# Altium PCB Cell.PcbDoc
Units mil, origin at the board's own origin, x right, y up, seen from the top; angles counter-clockwise.
Board outline 6000 x 4000 mil, 2 copper layers (Top Layer, Bottom Layer); 176 components, 145 nets, 448 pads, 0 vias.
Unrouted connection lines stored in the file: 271.
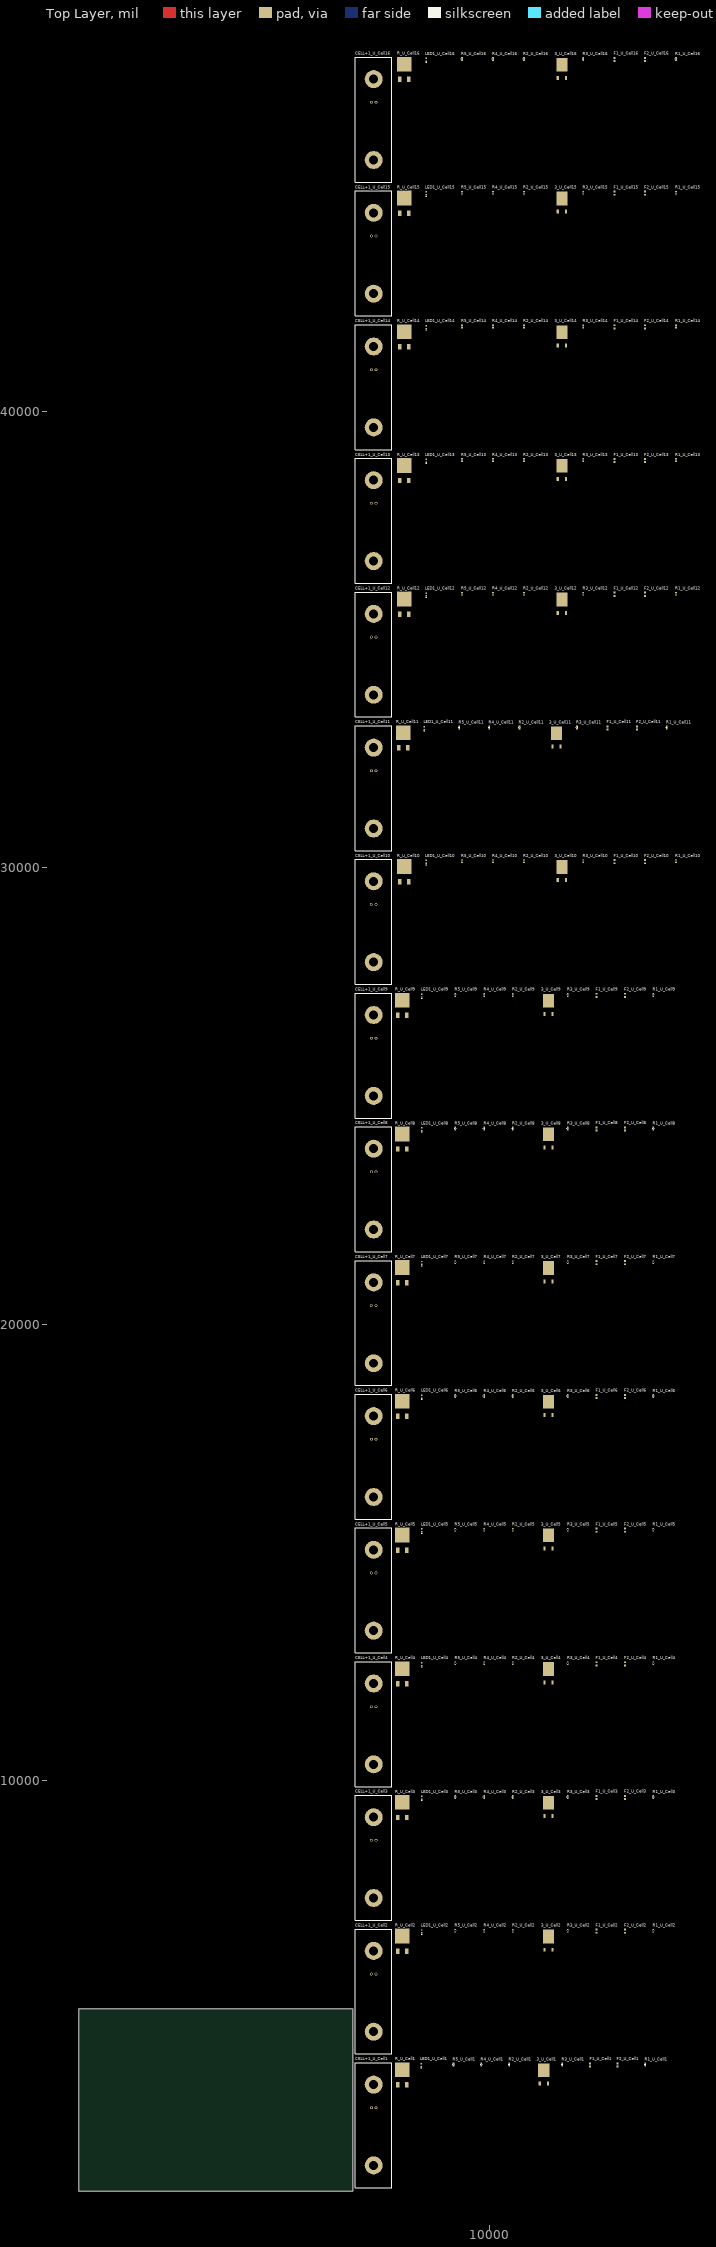
[diagram p0: Top Layer view]
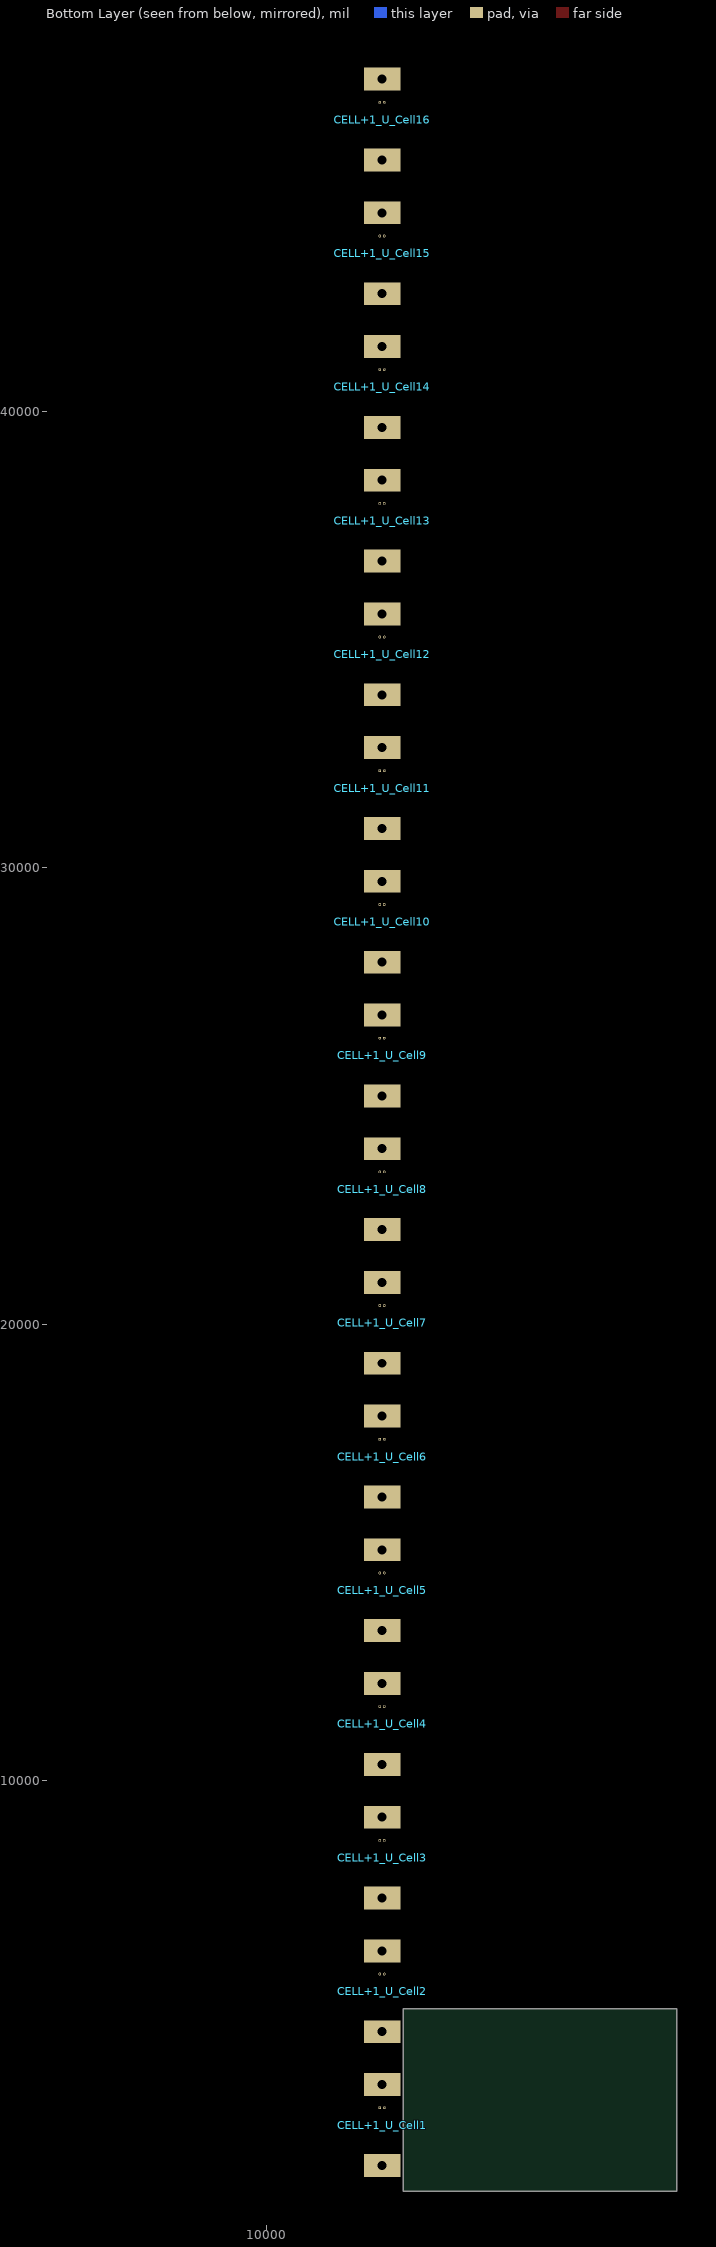
[diagram p1: Bottom Layer view, seen from below]

## Layer stack, top to bottom
Top Solder: solder mask 0.4, Solder Resist, Dk 3.5
Top Layer: signal copper 1.4
Dielectric 1: dielectric 12.6, FR-4, Dk 4.8
Bottom Layer: signal copper 1.4
Bottom Solder: solder mask 0.4, Solder Resist, Dk 3.5

## Board outline
1000,1000 7000,1000 7000,5000 1000,5000

## Design rules (kind name [scope] priority, off if disabled: settings)
Clearance [All] p1: gap=10 ignorepadtopadclearanceinfootprint=FALSE except(0: Arc-Hole Track-Hole SMDPad-Hole THPad-Hole Via-Hole Fill-Hole Poly-Hole Region-Hole Text-Hole)
PolygonConnect [All] p1: connectstyle=Relief reliefconductorwidth=10 reliefentries=4 polygonreliefangle="90 Angle" airgapwidth=10
RoomDefinition U_Cell16 [InComponentClass('U_Cell16')] p1: confinementstyle=ConfineIn formatcopy=TRUE lockcomponents=FALSE outline 7045,45015 14690,45015 14690,47890 7045,47890
RoomDefinition U_Cell15 [InComponentClass('U_Cell15')] p2: confinementstyle=ConfineIn formatcopy=TRUE lockcomponents=FALSE outline 7045,42085 14690,42085 14690,44960 7045,44960
RoomDefinition U_Cell14 [InComponentClass('U_Cell14')] p3: confinementstyle=ConfineIn formatcopy=TRUE lockcomponents=FALSE outline 7045,39155 14690,39155 14690,42030 7045,42030
RoomDefinition U_Cell13 [InComponentClass('U_Cell13')] p4: confinementstyle=ConfineIn formatcopy=TRUE lockcomponents=FALSE outline 7045,36225 14690,36225 14690,39100 7045,39100
RoomDefinition U_Cell12 [InComponentClass('U_Cell12')] p5: confinementstyle=ConfineIn formatcopy=TRUE lockcomponents=FALSE outline 7045,33295 14690,33295 14690,36170 7045,36170
RoomDefinition U_Cell10 [InComponentClass('U_Cell10')] p6: confinementstyle=ConfineIn formatcopy=TRUE lockcomponents=FALSE outline 7045,27435 14690,27435 14690,30310 7045,30310
RoomDefinition U_Cell9 [InComponentClass('U_Cell9')] p7: confinementstyle=ConfineIn formatcopy=TRUE lockcomponents=FALSE outline 7045,24505 14145,24505 14145,27380 7045,27380
RoomDefinition U_Cell8 [InComponentClass('U_Cell8')] p8: confinementstyle=ConfineIn formatcopy=TRUE lockcomponents=FALSE outline 7045,21575 14145,21575 14145,24450 7045,24450
RoomDefinition U_Cell7 [InComponentClass('U_Cell7')] p9: confinementstyle=ConfineIn formatcopy=TRUE lockcomponents=FALSE outline 7045,18645 14145,18645 14145,21520 7045,21520
RoomDefinition U_Cell6 [InComponentClass('U_Cell6')] p10: confinementstyle=ConfineIn formatcopy=TRUE lockcomponents=FALSE outline 7045,15715 14145,15715 14145,18590 7045,18590
RoomDefinition U_Cell5 [InComponentClass('U_Cell5')] p11: confinementstyle=ConfineIn formatcopy=TRUE lockcomponents=FALSE outline 7045,12785 14145,12785 14145,15660 7045,15660
RoomDefinition U_Cell4 [InComponentClass('U_Cell4')] p12: confinementstyle=ConfineIn formatcopy=TRUE lockcomponents=FALSE outline 7045,9855 14145,9855 14145,12730 7045,12730
RoomDefinition U_Cell3 [InComponentClass('U_Cell3')] p13: confinementstyle=ConfineIn formatcopy=TRUE lockcomponents=FALSE outline 7045,6925 14145,6925 14145,9800 7045,9800
RoomDefinition U_Cell2 [InComponentClass('U_Cell2')] p14: confinementstyle=ConfineIn formatcopy=TRUE lockcomponents=FALSE outline 7045,3995 14145,3995 14145,6870 7045,6870
RoomDefinition U_Cell1 [InComponentClass('U_Cell1')] p15: confinementstyle=ConfineIn formatcopy=TRUE lockcomponents=FALSE outline 7045,1065 13945,1065 13945,3940 7045,3940
RoomDefinition U_Cell11 [InComponentClass('U_Cell11')] p16: confinementstyle=ConfineIn formatcopy=TRUE lockcomponents=FALSE outline 1340,1115 3270,1115 3270,3980 1340,3980
RoutingVias [All] p1: holewidth=28 width=50 viastyle="Through Hole" minholewidth=28 minwidth=50 maxholewidth=28 maxwidth=50
SolderMaskExpansion [All] p1: expansion=4
Width [All] p1: maxlimit=10 minlimit=10 preferedwidth=10
30 further rules are at their usual default settings.

## Classes and differential pairs
channel class Cell: U_Cell1 U_Cell2 U_Cell3 U_Cell4 U_Cell5 U_Cell6 U_Cell7 U_Cell8 U_Cell9 U_Cell10 U_Cell11 U_Cell12 U_Cell13 U_Cell14 U_Cell15 U_Cell16
net class NEG[1..16]: NEG1 NEG2 NEG3 NEG4 NEG5 NEG6 NEG7 NEG8 NEG9 NEG10 NEG11 NEG12 NEG13 NEG14 NEG15 NEG16
component class U_Cell16: 3_U_Cell16 CELL+1_U_Cell16 F1_U_Cell16 F2_U_Cell16 LED1_U_Cell16 R1_U_Cell16 R2_U_Cell16 R3_U_Cell16 R4_U_Cell16 R5_U_Cell16 R_U_Cell16
component class U_Cell15: 3_U_Cell15 CELL+1_U_Cell15 F1_U_Cell15 F2_U_Cell15 LED1_U_Cell15 R1_U_Cell15 R2_U_Cell15 R3_U_Cell15 R4_U_Cell15 R5_U_Cell15 R_U_Cell15
component class U_Cell14: 3_U_Cell14 CELL+1_U_Cell14 F1_U_Cell14 F2_U_Cell14 LED1_U_Cell14 R1_U_Cell14 R2_U_Cell14 R3_U_Cell14 R4_U_Cell14 R5_U_Cell14 R_U_Cell14
component class U_Cell13: 3_U_Cell13 CELL+1_U_Cell13 F1_U_Cell13 F2_U_Cell13 LED1_U_Cell13 R1_U_Cell13 R2_U_Cell13 R3_U_Cell13 R4_U_Cell13 R5_U_Cell13 R_U_Cell13
component class U_Cell12: 3_U_Cell12 CELL+1_U_Cell12 F1_U_Cell12 F2_U_Cell12 LED1_U_Cell12 R1_U_Cell12 R2_U_Cell12 R3_U_Cell12 R4_U_Cell12 R5_U_Cell12 R_U_Cell12
component class U_Cell11: 3_U_Cell11 CELL+1_U_Cell11 F1_U_Cell11 F2_U_Cell11 LED1_U_Cell11 R1_U_Cell11 R2_U_Cell11 R3_U_Cell11 R4_U_Cell11 R5_U_Cell11 R_U_Cell11
component class U_Cell10: 3_U_Cell10 CELL+1_U_Cell10 F1_U_Cell10 F2_U_Cell10 LED1_U_Cell10 R1_U_Cell10 R2_U_Cell10 R3_U_Cell10 R4_U_Cell10 R5_U_Cell10 R_U_Cell10
component class U_Cell9: 3_U_Cell9 CELL+1_U_Cell9 F1_U_Cell9 F2_U_Cell9 LED1_U_Cell9 R1_U_Cell9 R2_U_Cell9 R3_U_Cell9 R4_U_Cell9 R5_U_Cell9 R_U_Cell9
component class U_Cell8: 3_U_Cell8 CELL+1_U_Cell8 F1_U_Cell8 F2_U_Cell8 LED1_U_Cell8 R1_U_Cell8 R2_U_Cell8 R3_U_Cell8 R4_U_Cell8 R5_U_Cell8 R_U_Cell8
component class U_Cell7: 3_U_Cell7 CELL+1_U_Cell7 F1_U_Cell7 F2_U_Cell7 LED1_U_Cell7 R1_U_Cell7 R2_U_Cell7 R3_U_Cell7 R4_U_Cell7 R5_U_Cell7 R_U_Cell7
component class U_Cell6: 3_U_Cell6 CELL+1_U_Cell6 F1_U_Cell6 F2_U_Cell6 LED1_U_Cell6 R1_U_Cell6 R2_U_Cell6 R3_U_Cell6 R4_U_Cell6 R5_U_Cell6 R_U_Cell6
component class U_Cell5: 3_U_Cell5 CELL+1_U_Cell5 F1_U_Cell5 F2_U_Cell5 LED1_U_Cell5 R1_U_Cell5 R2_U_Cell5 R3_U_Cell5 R4_U_Cell5 R5_U_Cell5 R_U_Cell5
component class U_Cell4: 3_U_Cell4 CELL+1_U_Cell4 F1_U_Cell4 F2_U_Cell4 LED1_U_Cell4 R1_U_Cell4 R2_U_Cell4 R3_U_Cell4 R4_U_Cell4 R5_U_Cell4 R_U_Cell4
component class U_Cell3: 3_U_Cell3 CELL+1_U_Cell3 F1_U_Cell3 F2_U_Cell3 LED1_U_Cell3 R1_U_Cell3 R2_U_Cell3 R3_U_Cell3 R4_U_Cell3 R5_U_Cell3 R_U_Cell3
component class U_Cell2: 3_U_Cell2 CELL+1_U_Cell2 F1_U_Cell2 F2_U_Cell2 LED1_U_Cell2 R1_U_Cell2 R2_U_Cell2 R3_U_Cell2 R4_U_Cell2 R5_U_Cell2 R_U_Cell2
component class U_Cell1: 3_U_Cell1 CELL+1_U_Cell1 F1_U_Cell1 F2_U_Cell1 LED1_U_Cell1 R1_U_Cell1 R2_U_Cell1 R3_U_Cell1 R4_U_Cell1 R5_U_Cell1 R_U_Cell1

## Components (designator, comment, footprint, x,y, rotation, side; value= is the part's Value field where it differs from the comment)
3_U_Cell1 "DMP10H400SK3-13" TO252 11190,3650 r0 top (schematic designator 3)
3_U_Cell2 "DMP10H400SK3-13" TO252 11290,6580 r0 top (schematic designator 3)
3_U_Cell3 "DMP10H400SK3-13" TO252 11290,9510 r0 top (schematic designator 3)
3_U_Cell4 "DMP10H400SK3-13" TO252 11290,12440 r0 top (schematic designator 3)
3_U_Cell5 "DMP10H400SK3-13" TO252 11290,15370 r0 top (schematic designator 3)
3_U_Cell6 "DMP10H400SK3-13" TO252 11290,18300 r0 top (schematic designator 3)
3_U_Cell7 "DMP10H400SK3-13" TO252 11290,21230 r0 top (schematic designator 3)
3_U_Cell8 "DMP10H400SK3-13" TO252 11290,24160 r0 top (schematic designator 3)
3_U_Cell9 "DMP10H400SK3-13" TO252 11290,27090 r0 top (schematic designator 3)
3_U_Cell10 "DMP10H400SK3-13" TO252 11585,30020 r0 top (schematic designator 3)
3_U_Cell11 "DMP10H400SK3-13" TO252 11465,32950 r0 top (schematic designator 3)
3_U_Cell12 "DMP10H400SK3-13" TO252 11585,35880 r0 top (schematic designator 3)
3_U_Cell13 "DMP10H400SK3-13" TO252 11585,38810 r0 top (schematic designator 3)
3_U_Cell14 "DMP10H400SK3-13" TO252 11585,41740 r0 top (schematic designator 3)
3_U_Cell15 "DMP10H400SK3-13" TO252 11585,44670 r0 top (schematic designator 3)
3_U_Cell16 "DMP10H400SK3-13" TO252 11585,47600 r0 top (schematic designator 3)
CELL+1_U_Cell1 "LI6PT" 6PT 7060,1080 r0 top (schematic designator CELL+1)
CELL+1_U_Cell2 "LI6PT" 6PT 7060,4010 r0 top (schematic designator CELL+1)
CELL+1_U_Cell3 "LI6PT" 6PT 7060,6940 r0 top (schematic designator CELL+1)
CELL+1_U_Cell4 "LI6PT" 6PT 7060,9870 r0 top (schematic designator CELL+1)
CELL+1_U_Cell5 "LI6PT" 6PT 7060,12800 r0 top (schematic designator CELL+1)
CELL+1_U_Cell6 "LI6PT" 6PT 7060,15730 r0 top (schematic designator CELL+1)
CELL+1_U_Cell7 "LI6PT" 6PT 7060,18660 r0 top (schematic designator CELL+1)
CELL+1_U_Cell8 "LI6PT" 6PT 7060,21590 r0 top (schematic designator CELL+1)
CELL+1_U_Cell9 "LI6PT" 6PT 7060,24520 r0 top (schematic designator CELL+1)
CELL+1_U_Cell10 "LI6PT" 6PT 7060,27450 r0 top (schematic designator CELL+1)
CELL+1_U_Cell11 "LI6PT" 6PT 7060,30380 r0 top (schematic designator CELL+1)
CELL+1_U_Cell12 "LI6PT" 6PT 7060,33310 r0 top (schematic designator CELL+1)
CELL+1_U_Cell13 "LI6PT" 6PT 7060,36240 r0 top (schematic designator CELL+1)
CELL+1_U_Cell14 "LI6PT" 6PT 7060,39170 r0 top (schematic designator CELL+1)
CELL+1_U_Cell15 "LI6PT" 6PT 7060,42100 r0 top (schematic designator CELL+1)
CELL+1_U_Cell16 "LI6PT" 6PT 7060,45030 r0 top (schematic designator CELL+1)
F1_U_Cell1 "SF-0603FP" 0603 12205,3765 r90 top (schematic designator F1)
F1_U_Cell2 "SF-0603FP" 0603 12345,6695 r90 top (schematic designator F1)
F1_U_Cell3 "SF-0603FP" 0603 12345,9625 r90 top (schematic designator F1)
F1_U_Cell4 "SF-0603FP" 0603 12345,12555 r90 top (schematic designator F1)
F1_U_Cell5 "SF-0603FP" 0603 12345,15485 r90 top (schematic designator F1)
F1_U_Cell6 "SF-0603FP" 0603 12345,18415 r90 top (schematic designator F1)
F1_U_Cell7 "SF-0603FP" 0603 12345,21345 r90 top (schematic designator F1)
F1_U_Cell8 "SF-0603FP" 0603 12345,24275 r90 top (schematic designator F1)
F1_U_Cell9 "SF-0603FP" 0603 12345,27205 r90 top (schematic designator F1)
F1_U_Cell10 "SF-0603FP" 0603 12740,30135 r90 top (schematic designator F1)
F1_U_Cell11 "SF-0603FP" 0603 12580,33065 r90 top (schematic designator F1)
F1_U_Cell12 "SF-0603FP" 0603 12740,35995 r90 top (schematic designator F1)
F1_U_Cell13 "SF-0603FP" 0603 12740,38925 r90 top (schematic designator F1)
F1_U_Cell14 "SF-0603FP" 0603 12740,41855 r90 top (schematic designator F1)
F1_U_Cell15 "SF-0603FP" 0603 12740,44785 r90 top (schematic designator F1)
F1_U_Cell16 "SF-0603FP" 0603 12740,47715 r90 top (schematic designator F1)
F2_U_Cell1 "SF-0603FP" 0603 12805,3765 r90 top (schematic designator F2)
F2_U_Cell2 "SF-0603FP" 0603 12965,6695 r90 top (schematic designator F2)
F2_U_Cell3 "SF-0603FP" 0603 12965,9625 r90 top (schematic designator F2)
F2_U_Cell4 "SF-0603FP" 0603 12965,12555 r90 top (schematic designator F2)
F2_U_Cell5 "SF-0603FP" 0603 12965,15485 r90 top (schematic designator F2)
F2_U_Cell6 "SF-0603FP" 0603 12965,18415 r90 top (schematic designator F2)
F2_U_Cell7 "SF-0603FP" 0603 12965,21345 r90 top (schematic designator F2)
F2_U_Cell8 "SF-0603FP" 0603 12965,24275 r90 top (schematic designator F2)
F2_U_Cell9 "SF-0603FP" 0603 12965,27205 r90 top (schematic designator F2)
F2_U_Cell10 "SF-0603FP" 0603 13410,30135 r90 top (schematic designator F2)
F2_U_Cell11 "SF-0603FP" 0603 13230,33065 r90 top (schematic designator F2)
F2_U_Cell12 "SF-0603FP" 0603 13410,35995 r90 top (schematic designator F2)
F2_U_Cell13 "SF-0603FP" 0603 13410,38925 r90 top (schematic designator F2)
F2_U_Cell14 "SF-0603FP" 0603 13410,41855 r90 top (schematic designator F2)
F2_U_Cell15 "SF-0603FP" 0603 13410,44785 r90 top (schematic designator F2)
F2_U_Cell16 "SF-0603FP" 0603 13410,47715 r90 top (schematic designator F2)
LED1_U_Cell1 "150060SS75000" 0603_A 8500,3760 r90 top (schematic designator LED1)
LED1_U_Cell2 "150060SS75000" 0603_A 8515,6690 r90 top (schematic designator LED1)
LED1_U_Cell3 "150060SS75000" 0603_A 8515,9620 r90 top (schematic designator LED1)
LED1_U_Cell4 "150060SS75000" 0603_A 8515,12550 r90 top (schematic designator LED1)
LED1_U_Cell5 "150060SS75000" 0603_A 8515,15480 r90 top (schematic designator LED1)
LED1_U_Cell6 "150060SS75000" 0603_A 8515,18410 r90 top (schematic designator LED1)
LED1_U_Cell7 "150060SS75000" 0603_A 8515,21340 r90 top (schematic designator LED1)
LED1_U_Cell8 "150060SS75000" 0603_A 8515,24270 r90 top (schematic designator LED1)
LED1_U_Cell9 "150060SS75000" 0603_A 8515,27200 r90 top (schematic designator LED1)
LED1_U_Cell10 "150060SS75000" 0603_A 8610,30130 r90 top (schematic designator LED1)
LED1_U_Cell11 "150060SS75000" 0603_A 8570,33060 r90 top (schematic designator LED1)
LED1_U_Cell12 "150060SS75000" 0603_A 8610,35990 r90 top (schematic designator LED1)
LED1_U_Cell13 "150060SS75000" 0603_A 8610,38920 r90 top (schematic designator LED1)
LED1_U_Cell14 "150060SS75000" 0603_A 8610,41850 r90 top (schematic designator LED1)
LED1_U_Cell15 "150060SS75000" 0603_A 8610,44780 r90 top (schematic designator LED1)
LED1_U_Cell16 "150060SS75000" 0603_A 8610,47710 r90 top (schematic designator LED1)
R1_U_Cell1 "100 1% 0603(1608)" RESC0603(1608)_L 13410,3775 r90 top value="2.94 Ohm" (schematic designator R1)
R1_U_Cell2 "100 1% 0603(1608)" RESC0603(1608)_L 13590,6705 r90 top value="2.94 Ohm" (schematic designator R1)
R1_U_Cell3 "100 1% 0603(1608)" RESC0603(1608)_L 13590,9635 r90 top value="2.94 Ohm" (schematic designator R1)
R1_U_Cell4 "100 1% 0603(1608)" RESC0603(1608)_L 13590,12565 r90 top value="2.94 Ohm" (schematic designator R1)
R1_U_Cell5 "100 1% 0603(1608)" RESC0603(1608)_L 13590,15495 r90 top value="2.94 Ohm" (schematic designator R1)
R1_U_Cell6 "100 1% 0603(1608)" RESC0603(1608)_L 13590,18425 r90 top value="2.94 Ohm" (schematic designator R1)
R1_U_Cell7 "100 1% 0603(1608)" RESC0603(1608)_L 13590,21355 r90 top value="2.94 Ohm" (schematic designator R1)
R1_U_Cell8 "100 1% 0603(1608)" RESC0603(1608)_L 13590,24285 r90 top value="2.94 Ohm" (schematic designator R1)
R1_U_Cell9 "100 1% 0603(1608)" RESC0603(1608)_L 13590,27215 r90 top value="2.94 Ohm" (schematic designator R1)
R1_U_Cell10 "100 1% 0603(1608)" RESC0603(1608)_L 14085,30145 r90 top value="2.94 Ohm" (schematic designator R1)
R1_U_Cell11 "100 1% 0603(1608)" RESC0603(1608)_L 13885,33075 r90 top value="2.94 Ohm" (schematic designator R1)
R1_U_Cell12 "100 1% 0603(1608)" RESC0603(1608)_L 14085,36005 r90 top value="2.94 Ohm" (schematic designator R1)
R1_U_Cell13 "100 1% 0603(1608)" RESC0603(1608)_L 14085,38935 r90 top value="2.94 Ohm" (schematic designator R1)
R1_U_Cell14 "100 1% 0603(1608)" RESC0603(1608)_L 14085,41865 r90 top value="2.94 Ohm" (schematic designator R1)
R1_U_Cell15 "100 1% 0603(1608)" RESC0603(1608)_L 14085,44795 r90 top value="2.94 Ohm" (schematic designator R1)
R1_U_Cell16 "100 1% 0603(1608)" RESC0603(1608)_L 14085,47725 r90 top value="2.94 Ohm" (schematic designator R1)
R2_U_Cell1 "2K 1% 0603(1608)" RESC0603(1608)_L 10430,3775 r90 top value="2.94 Ohm" (schematic designator R2)
R2_U_Cell2 "2K 1% 0603(1608)" RESC0603(1608)_L 10510,6705 r90 top value="2.94 Ohm" (schematic designator R2)
R2_U_Cell3 "2K 1% 0603(1608)" RESC0603(1608)_L 10510,9635 r90 top value="2.94 Ohm" (schematic designator R2)
R2_U_Cell4 "2K 1% 0603(1608)" RESC0603(1608)_L 10510,12565 r90 top value="2.94 Ohm" (schematic designator R2)
R2_U_Cell5 "2K 1% 0603(1608)" RESC0603(1608)_L 10510,15495 r90 top value="2.94 Ohm" (schematic designator R2)
R2_U_Cell6 "2K 1% 0603(1608)" RESC0603(1608)_L 10510,18425 r90 top value="2.94 Ohm" (schematic designator R2)
R2_U_Cell7 "2K 1% 0603(1608)" RESC0603(1608)_L 10510,21355 r90 top value="2.94 Ohm" (schematic designator R2)
R2_U_Cell8 "2K 1% 0603(1608)" RESC0603(1608)_L 10510,24285 r90 top value="2.94 Ohm" (schematic designator R2)
R2_U_Cell9 "2K 1% 0603(1608)" RESC0603(1608)_L 10510,27215 r90 top value="2.94 Ohm" (schematic designator R2)
R2_U_Cell10 "2K 1% 0603(1608)" RESC0603(1608)_L 10755,30145 r90 top value="2.94 Ohm" (schematic designator R2)
R2_U_Cell11 "2K 1% 0603(1608)" RESC0603(1608)_L 10655,33075 r90 top value="2.94 Ohm" (schematic designator R2)
R2_U_Cell12 "2K 1% 0603(1608)" RESC0603(1608)_L 10755,36005 r90 top value="2.94 Ohm" (schematic designator R2)
R2_U_Cell13 "2K 1% 0603(1608)" RESC0603(1608)_L 10755,38935 r90 top value="2.94 Ohm" (schematic designator R2)
R2_U_Cell14 "2K 1% 0603(1608)" RESC0603(1608)_L 10755,41865 r90 top value="2.94 Ohm" (schematic designator R2)
R2_U_Cell15 "2K 1% 0603(1608)" RESC0603(1608)_L 10755,44795 r90 top value="2.94 Ohm" (schematic designator R2)
R2_U_Cell16 "2K 1% 0603(1608)" RESC0603(1608)_L 10755,47725 r90 top value="2.94 Ohm" (schematic designator R2)
R3_U_Cell1 "100K NTC 1% 0603(1608)" RESC0603(1608)_L 11590,3775 r90 top value="2.94 Ohm" (schematic designator R3)
R3_U_Cell2 "100K NTC 1% 0603(1608)" RESC0603(1608)_L 11710,6705 r90 top value="2.94 Ohm" (schematic designator R3)
R3_U_Cell3 "100K NTC 1% 0603(1608)" RESC0603(1608)_L 11710,9635 r90 top value="2.94 Ohm" (schematic designator R3)
R3_U_Cell4 "100K NTC 1% 0603(1608)" RESC0603(1608)_L 11710,12565 r90 top value="2.94 Ohm" (schematic designator R3)
R3_U_Cell5 "100K NTC 1% 0603(1608)" RESC0603(1608)_L 11710,15495 r90 top value="2.94 Ohm" (schematic designator R3)
R3_U_Cell6 "100K NTC 1% 0603(1608)" RESC0603(1608)_L 11710,18425 r90 top value="2.94 Ohm" (schematic designator R3)
R3_U_Cell7 "100K NTC 1% 0603(1608)" RESC0603(1608)_L 11710,21355 r90 top value="2.94 Ohm" (schematic designator R3)
R3_U_Cell8 "100K NTC 1% 0603(1608)" RESC0603(1608)_L 11710,24285 r90 top value="2.94 Ohm" (schematic designator R3)
R3_U_Cell9 "100K NTC 1% 0603(1608)" RESC0603(1608)_L 11710,27215 r90 top value="2.94 Ohm" (schematic designator R3)
R3_U_Cell10 "100K NTC 1% 0603(1608)" RESC0603(1608)_L 12055,30145 r90 top value="2.94 Ohm" (schematic designator R3)
R3_U_Cell11 "100K NTC 1% 0603(1608)" RESC0603(1608)_L 11915,33075 r90 top value="2.94 Ohm" (schematic designator R3)
R3_U_Cell12 "100K NTC 1% 0603(1608)" RESC0603(1608)_L 12055,36005 r90 top value="2.94 Ohm" (schematic designator R3)
R3_U_Cell13 "100K NTC 1% 0603(1608)" RESC0603(1608)_L 12055,38935 r90 top value="2.94 Ohm" (schematic designator R3)
R3_U_Cell14 "100K NTC 1% 0603(1608)" RESC0603(1608)_L 12055,41865 r90 top value="2.94 Ohm" (schematic designator R3)
R3_U_Cell15 "100K NTC 1% 0603(1608)" RESC0603(1608)_L 12055,44795 r90 top value="2.94 Ohm" (schematic designator R3)
R3_U_Cell16 "100K NTC 1% 0603(1608)" RESC0603(1608)_L 12055,47725 r90 top value="2.94 Ohm" (schematic designator R3)
R4_U_Cell1 "330R 1% 0603(1608)" RESC0603(1608)_L 9820,3775 r90 top value="2.94 Ohm" (schematic designator R4)
R4_U_Cell2 "330R 1% 0603(1608)" RESC0603(1608)_L 9880,6705 r90 top value="2.94 Ohm" (schematic designator R4)
R4_U_Cell3 "330R 1% 0603(1608)" RESC0603(1608)_L 9880,9635 r90 top value="2.94 Ohm" (schematic designator R4)
R4_U_Cell4 "330R 1% 0603(1608)" RESC0603(1608)_L 9880,12565 r90 top value="2.94 Ohm" (schematic designator R4)
R4_U_Cell5 "330R 1% 0603(1608)" RESC0603(1608)_L 9880,15495 r90 top value="2.94 Ohm" (schematic designator R4)
R4_U_Cell6 "330R 1% 0603(1608)" RESC0603(1608)_L 9880,18425 r90 top value="2.94 Ohm" (schematic designator R4)
R4_U_Cell7 "330R 1% 0603(1608)" RESC0603(1608)_L 9880,21355 r90 top value="2.94 Ohm" (schematic designator R4)
R4_U_Cell8 "330R 1% 0603(1608)" RESC0603(1608)_L 9880,24285 r90 top value="2.94 Ohm" (schematic designator R4)
R4_U_Cell9 "330R 1% 0603(1608)" RESC0603(1608)_L 9880,27215 r90 top value="2.94 Ohm" (schematic designator R4)
R4_U_Cell10 "330R 1% 0603(1608)" RESC0603(1608)_L 10075,30145 r90 top value="2.94 Ohm" (schematic designator R4)
R4_U_Cell11 "330R 1% 0603(1608)" RESC0603(1608)_L 9995,33075 r90 top value="2.94 Ohm" (schematic designator R4)
R4_U_Cell12 "330R 1% 0603(1608)" RESC0603(1608)_L 10075,36005 r90 top value="2.94 Ohm" (schematic designator R4)
R4_U_Cell13 "330R 1% 0603(1608)" RESC0603(1608)_L 10075,38935 r90 top value="2.94 Ohm" (schematic designator R4)
R4_U_Cell14 "330R 1% 0603(1608)" RESC0603(1608)_L 10075,41865 r90 top value="2.94 Ohm" (schematic designator R4)
R4_U_Cell15 "330R 1% 0603(1608)" RESC0603(1608)_L 10075,44795 r90 top value="2.94 Ohm" (schematic designator R4)
R4_U_Cell16 "330R 1% 0603(1608)" RESC0603(1608)_L 10075,47725 r90 top value="2.94 Ohm" (schematic designator R4)
R5_U_Cell1 "3K3 1% 0603(1608)" RESC0603(1608)_L 9210,3775 r90 top value="2.94 Ohm" (schematic designator R5)
R5_U_Cell2 "3K3 1% 0603(1608)" RESC0603(1608)_L 9250,6705 r90 top value="2.94 Ohm" (schematic designator R5)
R5_U_Cell3 "3K3 1% 0603(1608)" RESC0603(1608)_L 9250,9635 r90 top value="2.94 Ohm" (schematic designator R5)
R5_U_Cell4 "3K3 1% 0603(1608)" RESC0603(1608)_L 9250,12565 r90 top value="2.94 Ohm" (schematic designator R5)
R5_U_Cell5 "3K3 1% 0603(1608)" RESC0603(1608)_L 9250,15495 r90 top value="2.94 Ohm" (schematic designator R5)
R5_U_Cell6 "3K3 1% 0603(1608)" RESC0603(1608)_L 9250,18425 r90 top value="2.94 Ohm" (schematic designator R5)
R5_U_Cell7 "3K3 1% 0603(1608)" RESC0603(1608)_L 9250,21355 r90 top value="2.94 Ohm" (schematic designator R5)
R5_U_Cell8 "3K3 1% 0603(1608)" RESC0603(1608)_L 9250,24285 r90 top value="2.94 Ohm" (schematic designator R5)
R5_U_Cell9 "3K3 1% 0603(1608)" RESC0603(1608)_L 9250,27215 r90 top value="2.94 Ohm" (schematic designator R5)
R5_U_Cell10 "3K3 1% 0603(1608)" RESC0603(1608)_L 9395,30145 r90 top value="2.94 Ohm" (schematic designator R5)
R5_U_Cell11 "3K3 1% 0603(1608)" RESC0603(1608)_L 9335,33075 r90 top value="2.94 Ohm" (schematic designator R5)
R5_U_Cell12 "3K3 1% 0603(1608)" RESC0603(1608)_L 9395,36005 r90 top value="2.94 Ohm" (schematic designator R5)
R5_U_Cell13 "3K3 1% 0603(1608)" RESC0603(1608)_L 9395,38935 r90 top value="2.94 Ohm" (schematic designator R5)
R5_U_Cell14 "3K3 1% 0603(1608)" RESC0603(1608)_L 9395,41865 r90 top value="2.94 Ohm" (schematic designator R5)
R5_U_Cell15 "3K3 1% 0603(1608)" RESC0603(1608)_L 9395,44795 r90 top value="2.94 Ohm" (schematic designator R5)
R5_U_Cell16 "3K3 1% 0603(1608)" RESC0603(1608)_L 9395,47725 r90 top value="2.94 Ohm" (schematic designator R5)
R_U_Cell1 "TKH45" TO252-TKH-45 8085,3820 r0 top (schematic designator R)
R_U_Cell2 "TKH45" TO252-TKH-45 8085,6750 r0 top (schematic designator R)
R_U_Cell3 "TKH45" TO252-TKH-45 8085,9680 r0 top (schematic designator R)
R_U_Cell4 "TKH45" TO252-TKH-45 8085,12610 r0 top (schematic designator R)
R_U_Cell5 "TKH45" TO252-TKH-45 8085,15540 r0 top (schematic designator R)
R_U_Cell6 "TKH45" TO252-TKH-45 8085,18470 r0 top (schematic designator R)
R_U_Cell7 "TKH45" TO252-TKH-45 8085,21400 r0 top (schematic designator R)
R_U_Cell8 "TKH45" TO252-TKH-45 8085,24330 r0 top (schematic designator R)
R_U_Cell9 "TKH45" TO252-TKH-45 8085,27260 r0 top (schematic designator R)
R_U_Cell10 "TKH45" TO252-TKH-45 8130,30190 r0 top (schematic designator R)
R_U_Cell11 "TKH45" TO252-TKH-45 8110,33120 r0 top (schematic designator R)
R_U_Cell12 "TKH45" TO252-TKH-45 8130,36050 r0 top (schematic designator R)
R_U_Cell13 "TKH45" TO252-TKH-45 8130,38980 r0 top (schematic designator R)
R_U_Cell14 "TKH45" TO252-TKH-45 8130,41910 r0 top (schematic designator R)
R_U_Cell15 "TKH45" TO252-TKH-45 8130,44840 r0 top (schematic designator R)
R_U_Cell16 "TKH45" TO252-TKH-45 8130,47770 r0 top (schematic designator R)

## Footprints (in the part's own frame and the unit in brackets; to place one, negate y for a bottom-side part, rotate by r counter-clockwise, add the part's x,y. Pads: shape width x height; smd on the part's side, far side on the other; paste and mask are expansions set on the pad)
6PT [mil]
  round 60 hole 40: 1(350.39,1746.46) 2(450.39,1746.46)
  rect 800x500 smd far side: CELL+(399,482) CELL-(400,2254)
  round 393.7 / inner round 60 / far side round 393.7 hole 196.85: CELL+(399.61,482.28) CELL-(399.61,2253.94)
  silkscreen extent -5,-5 800,2733, body extent 1,-3 800,2733
0603 [mm]
  rect 1.05x1.08 smd: 1(-0.875,0) 2(0.875,0)
  body extent -0.76,-0.38 0.76,0.38, height 0.64
0603_A [mm] "Chip LED, 2-Leads, Body 1.6x0.8mm, IPC Medium Density"
  rect 0.8x0.8 smd: 1(-0.8,0) 2(0.8,0)
  silkscreen extent -1.5,-0.3 -1.5,0.3, body extent -0.8,-0.4 0.8,0.4, height 0.7
RESC0603(1608)_L [mm] "Chip Resistor, Body 1.6x0.8mm, IPC High Density"
  rect 0.7x0.9 smd: 1(-0.7,0) 2(0.7,0)
  silkscreen extent -0.05,-0.35 0.05,0.35, body extent -0.85,-0.47 0.85,0.47, height 0.6
TO252 [mil]
  rect 47.24x86.61 smd: 1(-89.72,-291.69) 3(91.38,-291.69)
  rect 250x300 smd: 2(0.83,-0.35)
  body extent -127,-287 129,56, height 91
TO252-TKH-45 [mm]
  rect 2x3 smd: 1(-2.55,-12.5) 2(2.55,-12.5)
  rect 8x8.2 smd: 3(0,-4.1)
  body extent -4.15,-12.91 4.15,-0.91, height 0.89

## Part data
3_U_Cell1 3_U_Cell2 3_U_Cell3 3_U_Cell4 3_U_Cell5 3_U_Cell6 3_U_Cell7 3_U_Cell8 3_U_Cell9 3_U_Cell10 3_U_Cell11 3_U_Cell12 3_U_Cell13 3_U_Cell14 3_U_Cell15 3_U_Cell16: Package=TO252, DeviceSetName=DMP10H400SK3-13, GateName_1=G$1, LibraryName=IFE_Transistors, SymbolName_1=LABELED-PMOS
CELL+1_U_Cell1 CELL+1_U_Cell2 CELL+1_U_Cell3 CELL+1_U_Cell4 CELL+1_U_Cell5 CELL+1_U_Cell6 CELL+1_U_Cell7 CELL+1_U_Cell8 CELL+1_U_Cell9 CELL+1_U_Cell10 CELL+1_U_Cell11 CELL+1_U_Cell12 CELL+1_U_Cell13 CELL+1_U_Cell14 CELL+1_U_Cell15 CELL+1_U_Cell16: Package=6PT, DeviceSetName=LI6PT, GateName_1=G$1, GateName_2=G$2, LibraryName=IFE_Energus, SymbolName_1=ENERGUS_CELL, SymbolName_2=TEMP_JST_XH
F1_U_Cell1 F1_U_Cell2 F1_U_Cell3 F1_U_Cell4 F1_U_Cell5 F1_U_Cell6 F1_U_Cell7 F1_U_Cell8 F1_U_Cell9 F1_U_Cell10 F1_U_Cell11 F1_U_Cell12 F1_U_Cell13 F1_U_Cell14 F1_U_Cell15 F1_U_Cell16 F2_U_Cell1 F2_U_Cell2 F2_U_Cell3 F2_U_Cell4 F2_U_Cell5 F2_U_Cell6 F2_U_Cell7 F2_U_Cell8 F2_U_Cell9 F2_U_Cell10 F2_U_Cell11 F2_U_Cell12 F2_U_Cell13 F2_U_Cell14 F2_U_Cell15 F2_U_Cell16: Package=0603, DeviceSetName=SF-0603FP, GateName_1=G$1, LibraryName=IFE_Fuses, SymbolName_1=FUSE
LED1_U_Cell1 LED1_U_Cell2 LED1_U_Cell3 LED1_U_Cell4 LED1_U_Cell5 LED1_U_Cell6 LED1_U_Cell7 LED1_U_Cell8 LED1_U_Cell9 LED1_U_Cell10 LED1_U_Cell11 LED1_U_Cell12 LED1_U_Cell13 LED1_U_Cell14 LED1_U_Cell15 LED1_U_Cell16: library part CMP-1426-00004-1, "SMD mono-color Chip LED, WL-SMCW, Super Red", Color="Super Red", Manufacturer="Wuerth Elektronik", ComponentLink1Description="Manufacturer URL", ComponentLink1URL=http://www.we-online.com, ComponentLink2Description=Datasheet, ComponentLink2URL=http://katalog.we-online.com/led/datasheet/150060SS75000.pdf, PackageReference=0603_A, PartNumber=150060SS75000
R1_U_Cell1 R1_U_Cell2 R1_U_Cell3 R1_U_Cell4 R1_U_Cell5 R1_U_Cell6 R1_U_Cell7 R1_U_Cell8 R1_U_Cell9 R1_U_Cell10 R1_U_Cell11 R1_U_Cell12 R1_U_Cell13 R1_U_Cell14 R1_U_Cell15 R1_U_Cell16 R2_U_Cell1 R2_U_Cell2 R2_U_Cell3 R2_U_Cell4 R2_U_Cell5 R2_U_Cell6 R2_U_Cell7 R2_U_Cell8 R2_U_Cell9 R2_U_Cell10 R2_U_Cell11 R2_U_Cell12 R2_U_Cell13 R2_U_Cell14 R2_U_Cell15 R2_U_Cell16 R3_U_Cell1 R3_U_Cell2 R3_U_Cell3 R3_U_Cell4 R3_U_Cell5 R3_U_Cell6 R3_U_Cell7 R3_U_Cell8 R3_U_Cell9 R3_U_Cell10 R3_U_Cell11 R3_U_Cell12 R3_U_Cell13 R3_U_Cell14 R3_U_Cell15 R3_U_Cell16 R4_U_Cell1 R4_U_Cell2 R4_U_Cell3 R4_U_Cell4 R4_U_Cell5 R4_U_Cell6 R4_U_Cell7 R4_U_Cell8 R4_U_Cell9 R4_U_Cell10 R4_U_Cell11 R4_U_Cell12 R4_U_Cell13 R4_U_Cell14 R4_U_Cell15 R4_U_Cell16 R5_U_Cell1 R5_U_Cell2 R5_U_Cell3 R5_U_Cell4 R5_U_Cell5 R5_U_Cell6 R5_U_Cell7 R5_U_Cell8 R5_U_Cell9 R5_U_Cell10 R5_U_Cell11 R5_U_Cell12 R5_U_Cell13 R5_U_Cell14 R5_U_Cell15 R5_U_Cell16: library part CMP-1012-00222-1, "2R94 0.1W 1% 0603 (1608 Metric)  SMD", Case-EIA=0603, Case-Metric=1608, Power="0.1 W", Tolerance="1 %", Technology=SMT
R_U_Cell1 R_U_Cell2 R_U_Cell3 R_U_Cell4 R_U_Cell5 R_U_Cell6 R_U_Cell7 R_U_Cell8 R_U_Cell9 R_U_Cell10 R_U_Cell11 R_U_Cell12 R_U_Cell13 R_U_Cell14 R_U_Cell15 R_U_Cell16: Package=TO252-TKH-45, DeviceSetName=TKH45, GateName_1=G$1, LibraryName=IFE_Resistors, SymbolName_1=R-US

## Nets (pads, with @x,y where several pads share a name; then routed paths per layer and width w, separated by ;. In a path a pad name is that pad's centre, name@x,y a point inside that pad or via, vN(x,y) a via of type N, cw(c..) or ccw(c..) an arc to the next point about the centre after c; other vN are vias at no path point)
NEG1: CELL+1_U_Cell1.1 CELL+1_U_Cell1.CELL- LED1_U_Cell1.1 R_U_Cell1.1
NEG2: CELL+1_U_Cell1.CELL+ CELL+1_U_Cell2.1 CELL+1_U_Cell2.CELL- F1_U_Cell1.2 F2_U_Cell1.1 LED1_U_Cell2.1 R_U_Cell2.1
NEG3: CELL+1_U_Cell2.CELL+ CELL+1_U_Cell3.1 CELL+1_U_Cell3.CELL- F1_U_Cell2.2 F2_U_Cell2.1 LED1_U_Cell3.1 R_U_Cell3.1
NEG4: CELL+1_U_Cell3.CELL+ CELL+1_U_Cell4.1 CELL+1_U_Cell4.CELL- F1_U_Cell3.2 F2_U_Cell3.1 LED1_U_Cell4.1 R_U_Cell4.1
NEG5: CELL+1_U_Cell4.CELL+ CELL+1_U_Cell5.1 CELL+1_U_Cell5.CELL- F1_U_Cell4.2 F2_U_Cell4.1 LED1_U_Cell5.1 R_U_Cell5.1
NEG6: CELL+1_U_Cell5.CELL+ CELL+1_U_Cell6.1 CELL+1_U_Cell6.CELL- F1_U_Cell5.2 F2_U_Cell5.1 LED1_U_Cell6.1 R_U_Cell6.1
NEG7: CELL+1_U_Cell6.CELL+ CELL+1_U_Cell7.1 CELL+1_U_Cell7.CELL- F1_U_Cell6.2 F2_U_Cell6.1 LED1_U_Cell7.1 R_U_Cell7.1
NEG8: CELL+1_U_Cell7.CELL+ CELL+1_U_Cell8.1 CELL+1_U_Cell8.CELL- F1_U_Cell7.2 F2_U_Cell7.1 LED1_U_Cell8.1 R_U_Cell8.1
NEG9: CELL+1_U_Cell8.CELL+ CELL+1_U_Cell9.1 CELL+1_U_Cell9.CELL- F1_U_Cell8.2 F2_U_Cell8.1 LED1_U_Cell9.1 R_U_Cell9.1
NEG10: CELL+1_U_Cell9.CELL+ CELL+1_U_Cell10.1 CELL+1_U_Cell10.CELL- F1_U_Cell9.2 F2_U_Cell9.1 LED1_U_Cell10.1 R_U_Cell10.1
NEG11: CELL+1_U_Cell10.CELL+ CELL+1_U_Cell11.1 CELL+1_U_Cell11.CELL- F1_U_Cell10.2 F2_U_Cell10.1 LED1_U_Cell11.1 R_U_Cell11.1
NEG12: CELL+1_U_Cell11.CELL+ CELL+1_U_Cell12.1 CELL+1_U_Cell12.CELL- F1_U_Cell11.2 F2_U_Cell11.1 LED1_U_Cell12.1 R_U_Cell12.1
NEG13: CELL+1_U_Cell12.CELL+ CELL+1_U_Cell13.1 CELL+1_U_Cell13.CELL- F1_U_Cell12.2 F2_U_Cell12.1 LED1_U_Cell13.1 R_U_Cell13.1
NEG14: CELL+1_U_Cell13.CELL+ CELL+1_U_Cell14.1 CELL+1_U_Cell14.CELL- F1_U_Cell13.2 F2_U_Cell13.1 LED1_U_Cell14.1 R_U_Cell14.1
NEG15: CELL+1_U_Cell14.CELL+ CELL+1_U_Cell15.1 CELL+1_U_Cell15.CELL- F1_U_Cell14.2 F2_U_Cell14.1 LED1_U_Cell15.1 R_U_Cell15.1
NEG16: CELL+1_U_Cell15.CELL+ CELL+1_U_Cell16.1 CELL+1_U_Cell16.CELL- F1_U_Cell15.2 F2_U_Cell15.1 LED1_U_Cell16.1 R_U_Cell16.1
Net3_U_Cell1_1: 3_U_Cell1.1 R3_U_Cell1.1 R5_U_Cell1.2
Net3_U_Cell1_2: 3_U_Cell1.2 R4_U_Cell1.1 R_U_Cell1.2
Net3_U_Cell1_3: 3_U_Cell1.3 F2_U_Cell1.2 R1_U_Cell1.2 R3_U_Cell1.2 R_U_Cell1.3
Net3_U_Cell2_1: 3_U_Cell2.1 R3_U_Cell2.1 R5_U_Cell2.2
Net3_U_Cell2_2: 3_U_Cell2.2 R4_U_Cell2.1 R_U_Cell2.2
Net3_U_Cell2_3: 3_U_Cell2.3 F2_U_Cell2.2 R1_U_Cell2.2 R3_U_Cell2.2 R_U_Cell2.3
Net3_U_Cell3_1: 3_U_Cell3.1 R3_U_Cell3.1 R5_U_Cell3.2
Net3_U_Cell3_2: 3_U_Cell3.2 R4_U_Cell3.1 R_U_Cell3.2
Net3_U_Cell3_3: 3_U_Cell3.3 F2_U_Cell3.2 R1_U_Cell3.2 R3_U_Cell3.2 R_U_Cell3.3
Net3_U_Cell4_1: 3_U_Cell4.1 R3_U_Cell4.1 R5_U_Cell4.2
Net3_U_Cell4_2: 3_U_Cell4.2 R4_U_Cell4.1 R_U_Cell4.2
Net3_U_Cell4_3: 3_U_Cell4.3 F2_U_Cell4.2 R1_U_Cell4.2 R3_U_Cell4.2 R_U_Cell4.3
Net3_U_Cell5_1: 3_U_Cell5.1 R3_U_Cell5.1 R5_U_Cell5.2
Net3_U_Cell5_2: 3_U_Cell5.2 R4_U_Cell5.1 R_U_Cell5.2
Net3_U_Cell5_3: 3_U_Cell5.3 F2_U_Cell5.2 R1_U_Cell5.2 R3_U_Cell5.2 R_U_Cell5.3
Net3_U_Cell6_1: 3_U_Cell6.1 R3_U_Cell6.1 R5_U_Cell6.2
Net3_U_Cell6_2: 3_U_Cell6.2 R4_U_Cell6.1 R_U_Cell6.2
Net3_U_Cell6_3: 3_U_Cell6.3 F2_U_Cell6.2 R1_U_Cell6.2 R3_U_Cell6.2 R_U_Cell6.3
Net3_U_Cell7_1: 3_U_Cell7.1 R3_U_Cell7.1 R5_U_Cell7.2
Net3_U_Cell7_2: 3_U_Cell7.2 R4_U_Cell7.1 R_U_Cell7.2
Net3_U_Cell7_3: 3_U_Cell7.3 F2_U_Cell7.2 R1_U_Cell7.2 R3_U_Cell7.2 R_U_Cell7.3
Net3_U_Cell8_1: 3_U_Cell8.1 R3_U_Cell8.1 R5_U_Cell8.2
Net3_U_Cell8_2: 3_U_Cell8.2 R4_U_Cell8.1 R_U_Cell8.2
Net3_U_Cell8_3: 3_U_Cell8.3 F2_U_Cell8.2 R1_U_Cell8.2 R3_U_Cell8.2 R_U_Cell8.3
Net3_U_Cell9_1: 3_U_Cell9.1 R3_U_Cell9.1 R5_U_Cell9.2
Net3_U_Cell9_2: 3_U_Cell9.2 R4_U_Cell9.1 R_U_Cell9.2
Net3_U_Cell9_3: 3_U_Cell9.3 F2_U_Cell9.2 R1_U_Cell9.2 R3_U_Cell9.2 R_U_Cell9.3
Net3_U_Cell10_1: 3_U_Cell10.1 R3_U_Cell10.1 R5_U_Cell10.2
Net3_U_Cell10_2: 3_U_Cell10.2 R4_U_Cell10.1 R_U_Cell10.2
Net3_U_Cell10_3: 3_U_Cell10.3 F2_U_Cell10.2 R1_U_Cell10.2 R3_U_Cell10.2 R_U_Cell10.3
Net3_U_Cell11_1: 3_U_Cell11.1 R3_U_Cell11.1 R5_U_Cell11.2
Net3_U_Cell11_2: 3_U_Cell11.2 R4_U_Cell11.1 R_U_Cell11.2
Net3_U_Cell11_3: 3_U_Cell11.3 F2_U_Cell11.2 R1_U_Cell11.2 R3_U_Cell11.2 R_U_Cell11.3
Net3_U_Cell12_1: 3_U_Cell12.1 R3_U_Cell12.1 R5_U_Cell12.2
Net3_U_Cell12_2: 3_U_Cell12.2 R4_U_Cell12.1 R_U_Cell12.2
Net3_U_Cell12_3: 3_U_Cell12.3 F2_U_Cell12.2 R1_U_Cell12.2 R3_U_Cell12.2 R_U_Cell12.3
Net3_U_Cell13_1: 3_U_Cell13.1 R3_U_Cell13.1 R5_U_Cell13.2
Net3_U_Cell13_2: 3_U_Cell13.2 R4_U_Cell13.1 R_U_Cell13.2
Net3_U_Cell13_3: 3_U_Cell13.3 F2_U_Cell13.2 R1_U_Cell13.2 R3_U_Cell13.2 R_U_Cell13.3
Net3_U_Cell14_1: 3_U_Cell14.1 R3_U_Cell14.1 R5_U_Cell14.2
Net3_U_Cell14_2: 3_U_Cell14.2 R4_U_Cell14.1 R_U_Cell14.2
Net3_U_Cell14_3: 3_U_Cell14.3 F2_U_Cell14.2 R1_U_Cell14.2 R3_U_Cell14.2 R_U_Cell14.3
Net3_U_Cell15_1: 3_U_Cell15.1 R3_U_Cell15.1 R5_U_Cell15.2
Net3_U_Cell15_2: 3_U_Cell15.2 R4_U_Cell15.1 R_U_Cell15.2
Net3_U_Cell15_3: 3_U_Cell15.3 F2_U_Cell15.2 R1_U_Cell15.2 R3_U_Cell15.2 R_U_Cell15.3
Net3_U_Cell16_1: 3_U_Cell16.1 R3_U_Cell16.1 R5_U_Cell16.2
Net3_U_Cell16_2: 3_U_Cell16.2 R4_U_Cell16.1 R_U_Cell16.2
Net3_U_Cell16_3: 3_U_Cell16.3 F2_U_Cell16.2 R1_U_Cell16.2 R3_U_Cell16.2 R_U_Cell16.3
NetF1_U_Cell1_1: F1_U_Cell1.1 R2_U_Cell1.2
NetF1_U_Cell2_1: F1_U_Cell2.1 R2_U_Cell2.2
NetF1_U_Cell3_1: F1_U_Cell3.1 R2_U_Cell3.2
NetF1_U_Cell4_1: F1_U_Cell4.1 R2_U_Cell4.2
NetF1_U_Cell5_1: F1_U_Cell5.1 R2_U_Cell5.2
NetF1_U_Cell6_1: F1_U_Cell6.1 R2_U_Cell6.2
NetF1_U_Cell7_1: F1_U_Cell7.1 R2_U_Cell7.2
NetF1_U_Cell8_1: F1_U_Cell8.1 R2_U_Cell8.2
NetF1_U_Cell9_1: F1_U_Cell9.1 R2_U_Cell9.2
NetF1_U_Cell10_1: F1_U_Cell10.1 R2_U_Cell10.2
NetF1_U_Cell11_1: F1_U_Cell11.1 R2_U_Cell11.2
NetF1_U_Cell12_1: F1_U_Cell12.1 R2_U_Cell12.2
NetF1_U_Cell13_1: F1_U_Cell13.1 R2_U_Cell13.2
NetF1_U_Cell14_1: F1_U_Cell14.1 R2_U_Cell14.2
NetF1_U_Cell15_1: F1_U_Cell15.1 R2_U_Cell15.2
NetF1_U_Cell16_1: F1_U_Cell16.1 R2_U_Cell16.2
NetLED1_U_Cell1_2: LED1_U_Cell1.2 R4_U_Cell1.2
NetLED1_U_Cell2_2: LED1_U_Cell2.2 R4_U_Cell2.2
NetLED1_U_Cell3_2: LED1_U_Cell3.2 R4_U_Cell3.2
NetLED1_U_Cell4_2: LED1_U_Cell4.2 R4_U_Cell4.2
NetLED1_U_Cell5_2: LED1_U_Cell5.2 R4_U_Cell5.2
NetLED1_U_Cell6_2: LED1_U_Cell6.2 R4_U_Cell6.2
NetLED1_U_Cell7_2: LED1_U_Cell7.2 R4_U_Cell7.2
NetLED1_U_Cell8_2: LED1_U_Cell8.2 R4_U_Cell8.2
NetLED1_U_Cell9_2: LED1_U_Cell9.2 R4_U_Cell9.2
NetLED1_U_Cell10_2: LED1_U_Cell10.2 R4_U_Cell10.2
NetLED1_U_Cell11_2: LED1_U_Cell11.2 R4_U_Cell11.2
NetLED1_U_Cell12_2: LED1_U_Cell12.2 R4_U_Cell12.2
NetLED1_U_Cell13_2: LED1_U_Cell13.2 R4_U_Cell13.2
NetLED1_U_Cell14_2: LED1_U_Cell14.2 R4_U_Cell14.2
NetLED1_U_Cell15_2: LED1_U_Cell15.2 R4_U_Cell15.2
NetLED1_U_Cell16_2: LED1_U_Cell16.2 R4_U_Cell16.2
POS16: CELL+1_U_Cell16.CELL+ F1_U_Cell16.2 F2_U_Cell16.1
S1: R5_U_Cell1.1
S2: R5_U_Cell2.1
S3: R5_U_Cell3.1
S4: R5_U_Cell4.1
S5: R5_U_Cell5.1
S6: R5_U_Cell6.1
S7: R5_U_Cell7.1
S8: R5_U_Cell8.1
S9: R5_U_Cell9.1
S10: R5_U_Cell10.1
S11: R5_U_Cell11.1
S12: R5_U_Cell12.1
S13: R5_U_Cell13.1
S14: R5_U_Cell14.1
S15: R5_U_Cell15.1
S16: R5_U_Cell16.1
T1: CELL+1_U_Cell1.2 R2_U_Cell1.1
T2: CELL+1_U_Cell2.2 R2_U_Cell2.1
T3: CELL+1_U_Cell3.2 R2_U_Cell3.1
T4: CELL+1_U_Cell4.2 R2_U_Cell4.1
T5: CELL+1_U_Cell5.2 R2_U_Cell5.1
T6: CELL+1_U_Cell6.2 R2_U_Cell6.1
T7: CELL+1_U_Cell7.2 R2_U_Cell7.1
T8: CELL+1_U_Cell8.2 R2_U_Cell8.1
T9: CELL+1_U_Cell9.2 R2_U_Cell9.1
T10: CELL+1_U_Cell10.2 R2_U_Cell10.1
T11: CELL+1_U_Cell11.2 R2_U_Cell11.1
T12: CELL+1_U_Cell12.2 R2_U_Cell12.1
T13: CELL+1_U_Cell13.2 R2_U_Cell13.1
T14: CELL+1_U_Cell14.2 R2_U_Cell14.1
T15: CELL+1_U_Cell15.2 R2_U_Cell15.1
T16: CELL+1_U_Cell16.2 R2_U_Cell16.1
V1: R1_U_Cell1.1
V2: R1_U_Cell2.1
V3: R1_U_Cell3.1
V4: R1_U_Cell4.1
V5: R1_U_Cell5.1
V6: R1_U_Cell6.1
V7: R1_U_Cell7.1
V8: R1_U_Cell8.1
V9: R1_U_Cell9.1
V10: R1_U_Cell10.1
V11: R1_U_Cell11.1
V12: R1_U_Cell12.1
V13: R1_U_Cell13.1
V14: R1_U_Cell14.1
V15: R1_U_Cell15.1
V16: R1_U_Cell16.1